# Altium PCB USB_pwrmtr_v2.PcbDoc (part 2 of 2)
Units mm, origin at the board's own origin, x right, y up, seen from the top; angles counter-clockwise.
Board outline 25 x 55.1 mm, 4 copper layers (Top Layer, Layer 1, Layer 2, Bottom Layer), stack 1.564 mm thick; 63 components, 50 nets, 344 pads, 256 vias.
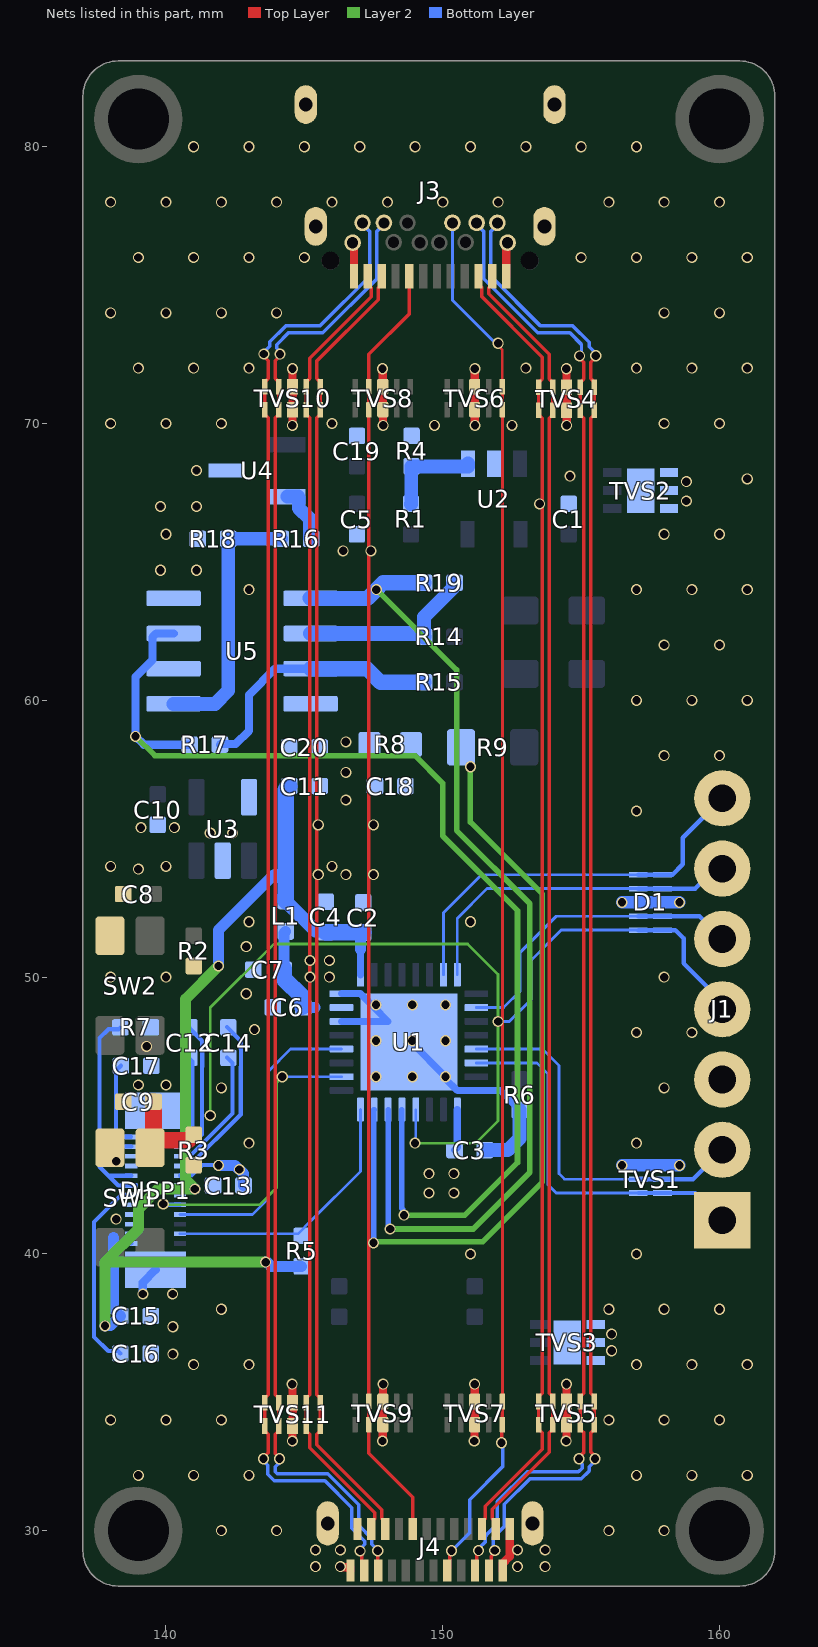
[diagram p4: the nets of this part, all layers, seen from the top]

## Via types
v1: diameter 0.4, hole 0.3, Top Layer to Bottom Layer, 112 vias
v2: diameter 0.4, hole 0.3, Layer 1 to Bottom Layer, tented both sides, 53 vias
v3: diameter 0.4, hole 0.3, Layer 2 to Bottom Layer, tented both sides, 41 vias
v4: diameter 0.4, hole 0.3, Top Layer to Bottom Layer, tented both sides, 34 vias
v5: diameter 0.4, hole 0.3, Top Layer to Layer 1, tented both sides, 14 vias
v6: diameter 0.4, hole 0.3, Top Layer to Layer 2, tented both sides, 2 vias

## Nets (pads, with @x,y where several pads share a name; then routed paths per layer and width w, separated by ;. In a path a pad name is that pad's centre, name@x,y a point inside that pad or via, vN(x,y) a via of type N, cw(c..) or ccw(c..) an arc to the next point about the centre after c; other vN are vias at no path point) (continued)
GND: C1.1 C2.1 C3.1 C4.1 C5.1 C6.1 C7.1 C8.1 C9.1 C10.1 C11.1 C13.1 C15.1 C16.1 C17.1 C18.2 C19.1 C20.1 D1.3_8 DISP1.5 DISP1.7 DISP1.10 DISP1.17 DISP1.19 DISP1.P1 DISP1.P2 J1.3 J3.A1 J3.A12 J3.B1 J3.B12 J3.S1 J3.S2 J3.S3 J3.S4 J4.A1 J4.A12 J4.B1 J4.B12 J4.S1 J4.S2 R4.2 R6.1 R7.2 R8.1 R18.1 SW1.2 SW2.2 TVS1.3 TVS1.4 TVS2.1 TVS2.2 TVS2.3 TVS2.7 TVS3.1 TVS3.2 TVS3.3 TVS3.7 TVS4.3 TVS4.8 TVS5.3 TVS5.8 TVS6.3 TVS6.8 TVS7.3 TVS7.8 TVS8.3 TVS8.8 TVS9.3 TVS9.8 TVS10.3 TVS10.8 TVS11.3 TVS11.8 U1.14 U1.16 U1.32 U1.33 U2.2 U3.2 U4.3 U5.8 | length 40.5
  Top Layer w0.3: v5@144.56,35.275 144.567,35.268 144.567,34.625 TVS11.8@144.575,34.617 TVS11.3@144.575,33.783 144.569,33.777 144.569,33.197 v5@144.563,33.191 ; v5(144.563,69.935) 144.569,69.94 144.569,70.494 TVS10.3@144.575,70.5 TVS10.8@144.575,71.335 144.572,71.338 144.572,71.969 v5@144.568,71.972 ; v1(146.3,28.7) 146.319,28.681 146.667,28.681 J4.B1@146.667,28.564 ; J3.B1@146.742,76.533 146.792,76.483 J3.A12@146.792,75.323 ; v5(147.824,71.981) 147.828,71.977 147.828,71.339 TVS8.8@147.832,71.335 TVS8.3@147.832,70.5 147.839,70.494 147.839,69.941 v4(147.845,69.935) ; v5(147.826,33.237) 147.829,33.241 147.829,33.829 TVS9.3@147.832,33.833 TVS9.8@147.832,34.667 147.84,34.675 147.84,35.285 v5(147.848,35.292) ; v5@151.138,33.241 151.146,33.249 151.146,33.824 TVS7.8@151.154,33.833 TVS7.3@151.154,34.667 TVS7.3@151.154,34.667 151.153,35.321 v5@151.152,35.322 ; v5@151.158,71.993 151.156,71.991 151.156,71.337 TVS6.3@151.154,71.335 TVS6.8@151.154,70.5 151.158,70.496 151.158,69.939 v4(151.162,69.935) ; J4.B12@152.167,28.564 152.167,28.814 152.417,29.064 J4.A1@152.417,30.064 ; J3.A1@152.292,75.323 152.292,76.483 J3.B12@152.342,76.533 ; v5@154.459,33.225 154.467,33.233 154.467,33.825 TVS5.3@154.475,33.833 TVS5.8@154.475,34.667 154.471,34.672 154.471,35.279 v5@154.467,35.283 ; v5@154.465,71.934 154.47,71.93 154.47,71.322 TVS4.8@154.475,71.317 TVS4.3@154.475,70.482 v4(154.475,69.935)
  Bottom Layer w0.15: DISP1.10@140.505,42.825 140.507,42.827 140.924,42.827 141.312,43.215 141.885,43.215 v2(141.9,43.2)
  Bottom Layer w0.254: U1.14@146.34,48.4 148.025,48.4 147.505,48.92 147.025,49.4 U1.16@146.34,49.4 ; v2(148.9,47.7) 148.9,47.6 v2(150.1,46.4) 150.1,46.325 150.525,45.9 U1.32@151.21,45.9 152.08,45.9 152.775,45.205 R6.1@152.775,45.2
  Bottom Layer w0.3: v2(139.165,38.551) 139.165,38.97 DISP1.P2@139.625,39.43
  Bottom Layer w0.4: v2(141.9,43.2) 142.5,43.2 142.8,42.9 C13.1@142.8,42.467
  Bottom Layer w0.45: v2(156.475,43.2) TVS1.3@157.112,43.2 v2(158.55,43.2) ; v2(156.475,52.7) D1.3_8@157.5,52.7 v2(158.55,52.7)
  Bottom Layer w0.5: C3.1@151.525,43.75 152.35,43.75 152.775,44.175 R6.1@152.775,45.2
  other v1: 145.4,28.7 152.7,28.7 153.7,28.7 145.4,29.3 146.3,29.3 152.7,29.3 153.7,29.3 142,30 144,30 156,30 158,30 139,32 141,32 143,32 157,32 159,32 161,32 138,34 140,34 142,34 156,34 158,34 160,34 141,36 143,36 157,36 159,36 161,36 142,38 156,38 158,38 160,38 151,40 157,40 143,44 157,44 142,46 158,46 157,48 159,48 138,50 140,50 158,50 143,52 151,52 138,54 140,54 146,54 157,56 158,58 160,58 157,60 159,60 161,60 158,62 160,62 143,64 157,64 159,64 161,64 140,66 158,66 160,66 161,68 138,70 140,70 142,70 146,70 158,70 160,70 139,72 141,72 143,72 153,72 157,72 159,72 161,72 138,74 140,74 142,74 144,74 158,74 160,74 139,76 141,76 143,76 145,76 155,76 157,76 159,76 161,76 138,78 140,78 142,78 144,78 146,78 148,78 150,78 152,78 156,78 158,78 160,78 141,80 143,80 145,80 147,80 149,80 151,80 153,80 155,80 157,80
  other v2: 140.248,36.379 156.1,36.5 156.1,37.1 140.248,37.369 140.24,38.551 138.2,41.254 142.65,43.05 138.2,43.35 140,46.1 147.585,46.4 148.9,46.4 139.3,47.5 147.585,47.7 150.1,47.7 143.2,48.1 147.585,49 148.9,49 150.1,49 142.9,49.4 142.9,51.1 145.5,53.7 146.5,53.7 147.5,53.7 141.6,55.2 142.4,55.2 139.1,55.4 140.3,55.4 145.5,55.5 147.5,55.5 146.5,56.4 146.5,57.4 146.5,58.5 139.8,64.7 141.1,64.7 146.4,65.4 147.4,65.4 139.8,67 141.1,67 153.5,67.1 158.8,67.2 158.8,67.9 154.6,68.1 141.1,68.3 149.7,69.935 152.5,69.935
  other v4: 139,46.1
  other v5: 144.563,33.237 151.138,33.237 154.459,33.237 144.56,35.292 151.152,35.292 154.467,35.292 139,53.9 144.568,71.981 151.158,71.981 154.465,71.981
NetC12_1: C12.1 DISP1.4 | length 4.8
  Bottom Layer w0.15: DISP1.4@140.68,43.875 140.857,43.875 141.3,44.318 141.3,46.749 141.31,46.759 141.31,47.41 141.3,47.42 141.3,47.702 140.857,48.145 C12.1@140.857,48.15
NetC12_2: C12.2 DISP1.2 | length 3.1
  Bottom Layer w0.15: DISP1.2@140.68,44.225 140.69,44.235 140.866,44.235 140.954,44.323 140.954,46.949 C12.2@140.857,47.045
NetC14_1: C14.1 DISP1.8 | length 6.2
  Bottom Layer w0.15: DISP1.8@140.68,43.175 140.836,43.175 142.7,45.039 142.7,46.749 142.71,46.759 142.71,47.41 142.7,47.42 142.7,47.695 C14.1@142.2,48.195
NetC14_2: C14.2 DISP1.6 | length 4.5
  Bottom Layer w0.15: DISP1.6@140.68,43.525 140.846,43.525 142.4,45.079 142.4,46.9 C14.2@142.2,47.1
NetC16_2: C16.2 DISP1.13 DISP1.15 | length 7.1
  Bottom Layer w0.15: C16.2@138.35,36.402 138.264,36.487 137.913,36.487 137.4,37 137.4,41.154 138.361,42.115 138.735,42.115 DISP1.13@138.745,42.125
NetC17_2: C17.2 DISP1.1 DISP1.3 | length 4.1
  Bottom Layer w0.15: C17.2@138.372,46.796 138.2,46.624 138.2,44.445 ; DISP1.1@138.734,44.235 138.41,44.235 138.2,44.445 ; DISP1.3@138.745,43.875 138.735,43.885 138.315,43.885 138.2,44 138.2,44.445
NetC18_1: C18.1 R8.2 R9.1 U1.7 | length 27.9
  Layer 2 w0.2: v3(147.5,40.4) 147.536,40.436 151.436,40.436 153.6,42.6 153.6,53 151,55.6 v3(151,57.6)
  Bottom Layer w0.2: v3(147.5,40.4) 147.513,40.413 147.513,45.203 U1.7@147.525,45.215
NetDISP1_9: DISP1.9 DISP1.11 R7.1 | length 8
  Bottom Layer w0.15: R7.1@138.354,48.184 138.286,48.117 137.917,48.117 137.6,47.8 137.6,43.15 137.925,42.825 ; DISP1.11@138.745,42.475 138.615,42.475 138.275,42.475 137.925,42.825 ; DISP1.11@138.745,42.485 138.91,42.485 DISP1.11@138.92,42.475 ; DISP1.9@138.745,42.825 137.925,42.825
NetR1_2: R1.2 R4.1 U2.1 | length 3.5
  Bottom Layer w0.5: R1.2@148.85,67.096 148.863,67.108 148.863,68.441 R4.1@148.875,68.453 150.906,68.453 150.91,68.457 U2.1@150.91,68.551
NetR14_2: R14.2 R19.2 U5.2 | length 6.6
  Bottom Layer w0.5: R14.2@149.325,62.3 149.325,63.005 150.375,64.055 150.375,64.205 150.42,64.25 R19.2@150.425,64.25
  Bottom Layer w0.55: U5.2@145.225,62.41 149.21,62.41 149.32,62.3 R14.2@149.325,62.3
NetR15_2: R15.2 R17.1 U5.3 | length 9.5
  Bottom Layer w0.3: R17.1@141.95,58.4 141.969,58.419 142.519,58.419 143,58.9 143,60.2 143.944,61.144 U5.3@145.225,61.144
  Bottom Layer w0.55: U5.3@145.225,61.14 147.26,61.14 147.75,60.65 R15.2@149.325,60.65
NetR16_1: R16.1 R18.2 U5.5 | length 9.6
  Bottom Layer w0.5: U5.5@140.275,59.87 141.77,59.87 142.25,60.35 R18.2@142.25,65.835 R16.1@144.15,65.835
NetR16_2: R16.2 U4.2 | length 2.1
  Bottom Layer w0.5: U4.2@144.384,67.36 144.765,67.36 144.795,67.331 144.795,66.95 145.2,66.545 145.2,65.88 145.245,65.835 R16.2@145.25,65.835
NetR17_2: R17.2 U1.5 U5.6 U5.7 | length 42.1
  Layer 2 w0.2: v3(138.9,58.7) 139.6,58 149,58 150,57 150,55.1 152.7,52.4 152.7,43.3 150.8,41.4 v3(148.6,41.4)
  Bottom Layer w0.2: U1.5@148.525,45.215 148.525,41.642 148.552,41.615 148.552,41.448 v3(148.6,41.4)
  Bottom Layer w0.3: U5.7@140.275,62.414 139.646,62.414 139.511,62.279 139.511,61.459 139.386,61.333 138.9,60.847 v3(138.9,58.7) 139.2,58.4 R17.2@140.85,58.4
NetR19_1: R19.1 U1.6 U5.1 | length 37.9
  Layer 2 w0.2: v3(147.6,64) 150.5,61.1 150.5,55.3 153.15,52.65 153.15,42.95 151.1,40.9 v3(148.1,40.9)
  Bottom Layer w0.2: U1.6@148.025,45.215 148.025,41.043 148.1,40.968 v3(148.1,40.9)
  Bottom Layer w0.55: U5.1@145.215,63.694 U5.1@145.225,63.684 ; U5.1@145.225,63.68 147.28,63.68 v3(147.6,64) 147.85,64.25 R19.1@149.325,64.25
NRST: C9.2 D1.1 D1.10 J1.4 R3.2 SW1.1 U1.4 | length 41.2
  Top Layer w0.6: SW1.1@139.425,43.837 139.55,43.962 C9.2@139.55,45.5 ; SW1.1@139.425,43.875 139.65,44.1 140.8,44.1 R3.2@141,44.3
  Layer 2 w0.1: v6(141.6,45) 141.6,48.9 143.9,51.2 150.9,51.2 152,50.1 v3(152,48.4) 152,44.8 151.2,44 v3(149,44)
  Bottom Layer w0.1: v3@149.019,44 149.025,44.006 U1.4@149.025,45.196 ; v3(152,48.4) 152.4,48.4 153.2,49.2 153.2,50.621 154.279,51.7 D1.1@157.062,51.7
  Bottom Layer w0.16: D1.1@157.062,51.7 D1.10@157.937,51.7 158.4,51.7 158.7,51.4 158.7,50.5 160.1,49.1 J1.4@160.1,48.84
RES#: DISP1.22 R5.2 U1.8 | length 9.7
  Bottom Layer w0.1: DISP1.22@140.505,40.725 144.77,40.725 145.245,41.2 145.25,41.2 147.025,42.975 U1.8@147.025,45.215
SBU1: J3.A8 J4.A8 TVS8.2 TVS8.9 TVS9.2 TVS9.9 | length 46.5
  Top Layer w0.125: J3.A8@148.792,75.323 148.792,73.956 147.332,72.497 TVS8.9@147.332,71.335 TVS8.2@147.332,70.5 TVS9.9@147.332,34.667 TVS9.2@147.332,33.833 147.332,32.799 148.917,31.215 J4.A8@148.917,30.064
SBU2: J3.B8 J4.B8 TVS6.1 TVS6.10 TVS7.1 TVS7.10 | length 50.4
  Top Layer w0.1: v4(152,72.9) 152,72.805 152.152,72.653 152.152,71.337 TVS6.1@152.154,71.335 TVS6.10@152.154,70.5 TVS7.1@152.154,34.667
  Top Layer w0.125: J4.B8@150.167,28.564 150.254,28.651 150.254,29.124 150.318,29.187 v4(150.318,29.275) ; v4(152.123,33.178) 152.138,33.193 152.138,33.817 TVS7.10@152.154,33.833 TVS7.1@152.154,34.667
  Bottom Layer w0.1: J3.B8@150.35,77.25 150.35,74.455 151.905,72.9 v4(152,72.9)
  Bottom Layer w0.125: v4(150.318,29.275) 150.325,29.275 150.975,29.925 150.975,31.125 152.175,32.325 152.175,33.126 v4(152.123,33.178)
SPI1_MOSI: DISP1.18 U1.12 | length 11
  Bottom Layer w0.1: DISP1.18@140.505,41.425 143.125,41.425 143.7,42 143.7,46.6 144.5,47.4 U1.12@146.34,47.4
SPI1_SCK: DISP1.16 U1.10 | length 11.2
  Layer 2 w0.1: v3(139.9,41.8) 139.926,41.774 143.374,41.774 144,42.4 144,46.2 v3(144.2,46.4)
  Bottom Layer w0.1: v3(144.2,46.4) U1.10@146.34,46.4
  Bottom Layer w0.15: v3(139.9,41.8) 139.925,41.775 DISP1.16@140.505,41.775
SSRX1_N: J3.B10 J4.B10 TVS4.4 TVS4.7 TVS5.4 TVS5.7 | length 54.1
  Top Layer w0.125: J4.B10@151.167,28.564 151.228,28.625 151.228,29.216 v4(151.289,29.277) ; v4(154.925,32.6) 154.925,32.659 155.102,32.836 155.102,33.537 155.026,33.613 155.012,33.613 154.975,33.65 TVS5.7@154.975,34.667 154.975,34.85 155.012,34.887 155.026,34.887 155.099,34.961 155.099,70.189 155.026,70.262 155.012,70.262 154.975,70.3 TVS4.4@154.975,70.482 154.975,71.5 155.012,71.537 155.022,71.537 155.095,71.611 155.095,72.217 154.946,72.366 v4(154.946,72.447)
  Bottom Layer w0.125: J3.B10@151.225,77.25 151.225,77.188 151.474,76.939 151.474,75.225 153.426,73.273 154.596,73.273 155.012,72.856 155.012,72.601 154.946,72.535 v4(154.946,72.447) ; v4(151.289,29.277) 151.289,29.344 151.542,29.598 151.542,29.794 151.579,29.831 151.579,29.86 151.973,30.254 151.973,31.054 153.046,32.127 154.902,32.127 155.036,32.261 155.036,32.401 154.925,32.512 v4(154.925,32.6)
SSRX1_P: J3.B11 J4.B11 TVS4.5 TVS4.6 TVS5.5 TVS5.6 | length 54.1
  Top Layer w0.125: J4.B11@151.667,28.564 151.754,28.651 151.754,29.076 151.877,29.199 v4(151.877,29.287) ; v4(155.502,32.6) 155.502,32.687 155.354,32.836 155.354,33.539 155.427,33.613 155.438,33.613 155.475,33.65 TVS5.6@155.475,34.667 155.475,34.85 155.438,34.887 155.424,34.887 155.351,34.961 155.351,70.189 155.424,70.262 155.438,70.262 155.475,70.3 TVS4.5@155.475,70.482 155.475,71.5 155.347,71.628 155.347,72.214 155.527,72.394 v4(155.527,72.45)
  Bottom Layer w0.125: v4(151.877,29.287) 151.831,29.333 151.831,29.756 152.225,30.15 152.225,30.95 153.15,31.875 155.007,31.875 155.288,32.156 155.288,32.314 155.502,32.527 v4(155.502,32.6) ; J3.B11@151.975,77.25 151.975,77.188 151.726,76.939 151.726,75.33 153.531,73.525 154.7,73.525 155.288,72.937 155.288,72.777 155.527,72.538 v4(155.527,72.45)
SSRX2_N: J3.A10 J4.A10 TVS10.5 TVS10.6 TVS11.5 TVS11.6 | length 47.5
  Top Layer w0.125: J3.A10@147.792,75.323 147.792,75.023 147.668,74.899 147.668,74.478 145.451,72.261 145.451,71.628 145.524,71.555 145.538,71.555 145.575,71.517 TVS10.6@145.575,71.335 145.575,70.317 145.538,70.28 145.524,70.28 145.451,70.207 145.451,34.911 145.524,34.837 145.538,34.837 145.575,34.8 TVS11.5@145.575,33.783 145.575,33.6 145.538,33.563 145.524,33.563 145.451,33.489 145.451,33.098 147.793,30.756 147.793,30.438 147.917,30.314 J4.A10@147.917,30.064
SSRX2_P: J3.A11 J4.A11 TVS10.4 TVS10.7 TVS11.4 TVS11.7 | length 47.5
  Top Layer w0.125: J3.A11@147.292,75.323 147.292,75.023 147.416,74.899 147.416,74.582 145.199,72.365 145.199,71.628 145.126,71.555 145.112,71.555 145.075,71.517 TVS10.7@145.075,71.335 145.075,70.317 145.112,70.28 145.126,70.28 145.199,70.207 145.199,34.911 145.126,34.837 145.112,34.837 145.075,34.8 TVS11.4@145.075,33.783 145.075,33.6 145.112,33.563 145.126,33.563 145.199,33.489 145.199,32.993 147.541,30.651 147.541,30.438 147.417,30.314 J4.A11@147.417,30.064
SSTX1_N: J3.A3 J4.A3 TVS4.1 TVS4.10 TVS5.1 TVS5.10 | length 47.4
  Top Layer w0.125: J3.A3@151.292,75.323 151.292,75.023 151.416,74.899 151.416,74.581 153.599,72.398 153.599,71.611 153.526,71.537 153.512,71.537 153.475,71.5 TVS4.1@153.475,70.482 153.475,70.3 153.512,70.262 153.526,70.262 153.599,70.189 153.599,34.961 153.526,34.887 153.512,34.887 153.475,34.85 TVS5.10@153.475,34.667 TVS5.1@153.475,33.833 153.475,33.65 153.512,33.613 153.526,33.613 153.599,33.539 153.599,32.937 151.541,30.879 151.541,30.438 151.417,30.314 J4.A3@151.417,30.064
SSTX1_P: J3.A2 J4.A2 TVS4.2 TVS4.9 TVS5.2 TVS5.9 | length 47.4
  Top Layer w0.125: J3.A2@151.792,75.323 151.792,75.023 151.668,74.899 151.668,74.685 153.851,72.502 153.851,71.611 153.924,71.537 153.938,71.537 153.975,71.5 TVS4.2@153.975,70.482 153.975,70.3 153.938,70.262 153.924,70.262 153.851,70.189 153.851,34.961 153.924,34.887 153.938,34.887 153.975,34.85 TVS5.9@153.975,34.667 TVS5.2@153.975,33.833 153.975,33.65 153.938,33.613 153.924,33.613 153.851,33.539 153.851,32.832 151.793,30.774 151.793,30.438 151.917,30.314 J4.A2@151.917,30.064
SSTX2_N: J3.B3 J4.B3 TVS10.2 TVS10.9 TVS11.2 TVS11.9 | length 54.1
  Top Layer w0.125: v4@144.1,32.55 144.1,32.637 143.951,32.786 143.951,33.489 144.024,33.563 144.038,33.563 144.075,33.6 TVS11.2@144.075,33.783 TVS11.9@144.075,34.617 144.075,34.8 144.038,34.837 144.024,34.837 143.951,34.911 143.951,70.207 144.024,70.28 144.038,70.28 144.075,70.317 TVS10.2@144.075,70.5 TVS10.9@144.075,71.335 144.075,71.517 144.038,71.555 144.024,71.555 143.951,71.628 143.951,71.925 143.951,72.275 144.118,72.442 v4(144.118,72.506) ; v4(147.65,29.275) 147.659,29.266 147.659,28.572 J4.B3@147.667,28.564
  Bottom Layer w0.125: v4@144.1,32.55 144.1,32.462 143.95,32.312 143.95,32.125 144.023,32.052 145.848,32.052 146.965,30.935 146.965,30.189 147.437,29.718 147.437,29.511 147.65,29.297 v4(147.65,29.275) ; v4(144.118,72.506) 144.118,72.594 143.997,72.714 143.997,72.845 144.425,73.273 145.666,73.273 147.613,75.221 147.613,76.939 147.875,77.201 J3.B3@147.875,77.25
  other v4: 144.1,32.6
SSTX2_P: J3.B2 J4.B2 TVS10.1 TVS10.10 TVS11.1 TVS11.10 | length 54.2
  Top Layer w0.125: v4@143.523,32.55 143.523,32.638 143.699,32.814 143.699,33.489 143.626,33.563 143.612,33.563 143.575,33.6 TVS11.10@143.575,34.617 143.575,34.8 143.612,34.837 143.626,34.837 143.699,34.911 143.699,70.207 143.626,70.28 143.612,70.28 143.575,70.317 TVS10.1@143.575,70.5 143.575,71.517 143.612,71.555 143.626,71.555 143.699,71.628 143.699,71.821 ; v4(143.536,72.511) 143.536,72.437 143.699,72.275 143.699,71.821 ; v4(147.017,29.268) 147.017,29.18 147.08,29.118 147.08,28.651 J4.B2@147.167,28.564
  Bottom Layer w0.125: v4@143.523,32.55 143.523,32.516 143.675,32.364 143.675,32.044 143.919,31.8 145.744,31.8 146.713,30.83 146.713,30.085 147.185,29.614 147.185,29.504 147.017,29.336 v4(147.017,29.268) ; v4(143.536,72.511) 143.536,72.578 143.745,72.787 143.745,72.95 144.321,73.525 145.561,73.525 147.361,75.325 147.361,76.939 147.1,77.201 J3.B2@147.1,77.25
  other v4: 143.523,32.6
SWCLK: D1.4 D1.7 J1.6 U1.24 | length 12.4
  Bottom Layer w0.1: U1.24@150.525,50.085 150.525,52.125 151.6,53.2 D1.4@157.062,53.2
  Bottom Layer w0.16: D1.4@157.062,53.2 D1.7@157.937,53.2 159.125,53.2 159.845,53.92 J1.6@160.1,53.92
SWDIO: D1.5 D1.6 J1.7 U1.23 | length 14.6
  Bottom Layer w0.1: U1.23@150.025,50.085 150.025,52.325 151.4,53.7 D1.5@157.062,53.7
  Bottom Layer w0.16: D1.5@157.062,53.7 D1.6@157.937,53.7 158.3,53.7 158.674,54.074 158.674,55.034 J1.7@160.1,56.46
SWO: D1.2 D1.9 J1.5 U1.26 | length 11.4
  Bottom Layer w0.1: U1.26@151.21,48.9 152.2,48.9 152.8,49.5 152.8,50.9 154.1,52.2 D1.2@157.062,52.2
  Bottom Layer w0.16: D1.2@157.062,52.2 D1.9@157.937,52.2 159.276,52.2 160.096,51.38 J1.5@160.1,51.38
USART1_RX: J1.1 TVS1.1 TVS1.6 U1.30 | length 13.6
  Bottom Layer w0.1: U1.30@151.21,46.9 153.4,46.9 153.8,46.5 153.8,42.5 154.1,42.2 TVS1.1@157.065,42.2
  Bottom Layer w0.16: TVS1.1@157.065,42.2 TVS1.6@157.935,42.2 159.12,42.2 J1.1@160.1,41.22
USART1_TX: J1.2 TVS1.2 TVS1.5 U1.29 | length 13.6
  Bottom Layer w0.1: U1.29@151.21,47.4 153.6,47.4 154.2,46.8 154.2,42.9 154.4,42.7 TVS1.2@157.065,42.7
  Bottom Layer w0.16: TVS1.2@157.065,42.7 TVS1.5@157.935,42.7 159.04,42.7 J1.2@160.1,43.76
VDD: C2.2 C3.2 C4.2 C11.2 C13.2 C15.2 C20.2 DISP1.12 DISP1.14 DISP1.21 DISP1.23 L1.1 R2.1 R3.1 R5.1 U1.1 U1.17 U3.5 U5.4 | length 43.2
  Layer 2 w0.4: v3(137.8,37.4) 137.8,39.7 ; v4(141.9,50.4) 140.7,49.2 140.7,42.687 v4(141.042,42.345) 139.717,42.345 139,41.628 139,40.9 137.8,39.7 ; v3(143.6,39.7) 137.8,39.7
  Bottom Layer w0.15: 138.1,40.6 138.325,40.375 DISP1.23@138.745,40.375
  Bottom Layer w0.254: U1.17@147.025,50.085 147.025,50.996 ; C3.2@150.425,43.75 150.523,43.848 150.523,45.213 U1.1@150.525,45.215
  Bottom Layer w0.4: v3(137.8,37.4) 137.81,37.41 138,37.41 138.254,37.664 138.259,37.664 C15.2@138.354,37.759 138.349,37.759 138.254,37.854 138.254,37.859 138.1,38.013 138.1,40.6 ; v4(141.9,50.4) 141.9,51.699 143.892,53.69 143.99,53.69 144,53.7 144.324,53.376 144.325,53.375 L1.1@144.325,52.75 ; v3(143.6,39.7) 143.654,39.7 143.804,39.55 R5.1@144.9,39.55 ; C4.2@145.768,51.529 C4.2@145.771,51.525 ; 147.025,50.996 147.026,50.997 147.026,51.266 147.03,51.269 147.03,51.505 C2.2@147.125,51.6
  Bottom Layer w0.5: L1.1@144.324,52.746 144.37,52.7 144.372,52.7 145.397,51.675 145.723,51.675 145.768,51.63 C4.2@145.768,51.625
  Bottom Layer w0.6: L1.1@144.324,52.751 144.324,53.376 144.324,56.774 C11.2@144.45,56.9 ; C4.2@145.768,51.625 147.125,51.625 C2.2@147.125,51.6
  other v3: 149.5,42.2 150.4,42.2 149.5,42.9 150.4,42.9 145.2,50 145.9,50 145.2,50.6 145.9,50.6
VDDA: C6.2 C7.2 L1.2 U1.15 | length 3.9
  Bottom Layer w0.4: C7.2@144.27,50.307 144.27,51.595 L1.2@144.325,51.65 ; C6.2@144.925,48.935 ccw(c145.01,49.02) C6.2@145.01,48.9 ; C6.2@144.96,48.9 C6.2@145.01,48.9 ; C6.2@145.01,48.9 145.389,48.9 C6.2@145.01,48.9
  Bottom Layer w0.6: C7.2@144.25,50.3 144.25,49.955 144.925,49.28 C6.2@144.925,48.935
pads on no net: J3. SW1.1' SW1.2' SW2.1' SW2.2' U1.2 U1.3 U1.13 U1.19 U1.20 U1.21 U1.22 U1.25 U1.27 U1.28 U2.3 U3.1 U3.3

## Polygon pours and split planes (outlines as drawn)
VDD on Bottom Layer "VDD_L04_P082" (solid, pour order 82): 150.138,44.044 ccw(c149.505,44.676) 150.4,44.676 150.4,44.8 150.65,44.8 150.65,44.231 ccw(c150.914,44.231) 150.727,44.044 150.814,43.957 ccw(c150.814,43.52) 150.504,43.829 150.425,43.75
VDD on Bottom Layer "VDD_L04_P039" (solid, pour order 39): 150.9,43.871 150.727,44.044 150.138,44.044 149.9,43.806 149.9,43.293 149.755,43.148 149.327,43.148 149.2,43.021 149.2,42 149.3,41.9 150.572,41.9 150.9,42.228
NetC16_2 on Bottom Layer "NETC16_2_L04_P062" (solid, pour order 62): 138.967,42.206 138.006,42.206 137.921,42.121 137.921,41.779 138.008,41.692 138.963,41.692
CABLE_VCC_USB_C on Bottom Layer "CABLE_VCC_USB_C_L04_P075" (solid, pour order 75): 155.4,68.413 155.4,69.154 155.408,69.145 156.8,69.145 156.8,68.7 156.5,68.4
CABLE_VCC_USB_C on Bottom Layer "CABLE_VCC_USB_C_L04_P074" (solid, pour order 74): 155.4,68.707 155.4,69.6 155.7,69.9 156.6,69.9 156.8,69.7 156.8,68.691
4V on Bottom Layer "4V_L04_P011" (solid, pour order 11): 143.1,69.543 143.1,69 143.8,68.3 145.2,68.3 146.2,67.3 146.2,66.9 146.5,66.6 147.3,66.6 148.5,65.4 151.1,65.4 151.3,65.6 151.3,66.4 151.2,66.5 148.6,66.5 147.7,67.4 147.7,68.8 147.5,69 145.9,69 145.357,69.543
GND on Bottom Layer "GND_L04_P072" (solid, pour order 72): 144.2,49.1 143.5,49.8 143.5,51.1 143.2,51.4 142.6,51.4 142.3,51.1 142.3,49 142.5,48.8 142.8,48.8 142.9,48.7 142.9,48 143.1,47.8 144,47.8 144.2,48
DUT_VCC_USB_C on Bottom Layer "DUT_VCC_USB_C_L04_P004" (solid, pour order 4): 146.1,35.8 145.872,36.028 145.872,36.472 146.2,36.8 151.7,36.8 152.1,37.2 152.1,39.9 152.4,40.2 153.4,40.2 153.8,39.8 153.8,36 153.6,35.8
GND on Bottom Layer "GND_L04_P070" (solid, pour order 70): 138.953,55.047 141.353,55.047 141.7,54.7 141.7,53.6 141.8,53.5 142.3,53.5 142.4,53.6 142.4,54.7 142.8,55.1 142.8,55.4 142.582,55.618 140.682,55.618 140.4,55.9 138.9,55.9 138.8,55.8 138.8,55.2
GND on Bottom Layer "GND_L04_P064" (solid, pour order 64): 138.53,40.091 138.525,38.766 138.805,38.5 139.1,38.205 139.1,36.1 139.2,36 140.3,36 140.5,36.2 140.5,38.541 140.724,38.766 140.093,39.4 139.2,39.4
GND on Bottom Layer "GND_L04_P063" (solid, pour order 63): 138.963,41.508 138.034,41.508 137.925,41.399 137.925,41.099 138.028,40.995 138.961,40.995
VDD on Bottom Layer "VDD_L04_P061" (solid, pour order 61): 138.965,40.806 138.006,40.806 137.913,40.713 137.913,40.387 138.01,40.29 138.965,40.29
DUT_VCC_USB_C on Bottom Layer "DUT_VCC_USB_C_L04_P060" (solid, pour order 60): 156.1,55.7 156.5,56.1 156.5,61.4 156,61.9 155.2,61.1 155.2,59.3
DUT_VCC_USB_C on Bottom Layer "DUT_VCC_USB_C_L04_P017" (solid, pour order 17): 151.9,58.3 151.9,57.1 153.7,55.3 155.7,55.3 156.1,55.7 156.1,60.3 153.9,60.3
DUT_VCC_USB_C on Bottom Layer "DUT_VCC_USB_C_L04_P018" (solid, pour order 18): 152.25,40.05 153,40.8 155.8,40.8 156.1,40.5 156.1,38.9 155.2,38 153.2,38 153.2,39.1
GND on Bottom Layer "GND_L04_P053" (solid, pour order 53): 138.5,44.5 138.5,46 138.9,46.4 138.9,48.3 139.1,48.5 139.8,48.5 140,48.3 140,46.5 140.725,45.835
VDD on Bottom Layer "VDD_L04_P052" (solid, pour order 52): 140.3,42.6 141,42.6 141.165,42.765 141.935,42.765 142,42.7 142,42.218 141.821,42.039 140.284,42.039 140.284,42.584
GND on Bottom Layer "GND_L04_P051" (solid, pour order 51): 138.966,43.608 138.028,43.608 137.919,43.5 137.919,43.2 138.029,43.089 138.965,43.089
GND on Bottom Layer "GND_L04_P037" (solid, pour order 37): 156.65,68.385 158.815,68.385 159.1,68.1 159.1,67 158.875,66.775 156.65,66.775
GND on Bottom Layer "GND_L04_P044" (solid, pour order 44): 154,37.6 156.2,37.6 156.4,37.4 156.4,36.2 156.2,36 154,36
NetR1_2 on Bottom Layer "NETR1_2_L04_P043" (solid, pour order 43): 150.8,66.7 151.196,66.7 151.3,66.804 151.3,67.2 151.2,67.1 150.85,67.1
NetR1_2 on Bottom Layer "NETR1_2_L04_P042" (solid, pour order 42): 151.3,67 151,66.7 150.8,66.7 151.3,67.2
NetR1_2 on Bottom Layer "NETR1_2_L04_P041" (solid, pour order 41): 151.164,69.027 151.3,68.891 151.3,67 151.164,66.864
NetR1_2 on Bottom Layer "NETR1_2_L04_P040" (solid, pour order 40): 151.164,69.027 151.164,67.064 150.8,66.7 148.7,66.7 147.9,67.5 147.9,68.8 148.1,69
VDD on Bottom Layer "VDD_L04_P027" (solid, pour order 27): 144.418,52.298 144.9,51.816 144.9,49.985 145.185,49.7 145.929,49.7 146.2,49.971 146.2,51.8 145.4,51.8 144.9,52.3 144.35,52.3
VDD on Bottom Layer "VDD_L04_P019" (solid, pour order 19): 144.3,60.4 143.7,59.8 143.7,57.7 143.3,57.3 142.8,57.3 142.6,57.1 142.6,55.9 142.8,55.7 144.5,55.7 144.9,56.1 144.9,58.7 145.4,59.2 146.3,59.2 146.5,59.4 146.5,60.1 146.2,60.4
GND on Bottom Layer "GND_L04_P036" (solid, pour order 36): 147.2,66.4 147.7,65.9 147.7,65.3 147.5,65.1 146.3,65.1 146.1,65.3 146.1,65.9 146.6,66.4
CABLE_VCC_USB_C on Bottom Layer "CABLE_VCC_USB_C_L04_P007" (solid, pour order 7): 151.5,62.8 151.9,62.4 156.1,62.4 156.5,62.8 156.5,68.4 156.4,68.5 155.487,68.5 155.4,68.413 155.4,66.7 155.2,66.5 151.6,66.5 151.5,66.4
GND on Bottom Layer "GND_L04_P035" (solid, pour order 35): 155,66.7 155.2,66.9 155.2,69.7 154.4,70.5 146.7,70.5 146.3,70.1 146.3,69.5 146.557,69.243 151.5,69.243 151.5,66.8 151.6,66.7
GND on Bottom Layer "GND_L04_P033" (solid, pour order 33): 141.4,63 141.6,63.2 141.6,67.1 141.8,67.3 142.9,67.3 143.1,67.5 143.1,68.5 142.9,68.7 140.5,68.7 139.2,67.4 139.2,63.2 139.4,63
NetR17_2 on Bottom Layer "NETR17_2_L04_P029" (solid, pour order 29): 140.9,62.7 139.35,62.7 139.2,62.55 139.2,61.219 138.84,60.859 140.909,60.859 141.25,61.2 141.25,62.475
VDD on Bottom Layer "VDD_L04_P026" (solid, pour order 26): 144.9,56.1 144.9,52.5 144.7,52.3 144,52.3 143.8,52.5 143.8,55.5 143.5,55.8 143.8,56.1
GND on Bottom Layer "GND_L04_P025" (solid, pour order 25): 145.1,52.7 145.6,52.2 147.4,52.2 148,52.8 148,58.6 147.6,59 145.5,59 145.1,58.6
VDD on Bottom Layer "VDD_L04_P021" (solid, pour order 21): 147.152,50.483 147.152,50.78 cw(c147.33,50.776) 147.167,50.848 cw(c147.309,50.787) 147.182,50.874 cw(c147.319,50.786) 147.202,50.9 146.84,50.919 cw(c146.678,50.81) 146.858,50.885 cw(c146.681,50.738) 146.885,50.845 cw(c146.681,50.769) 146.899,50.761 146.899,50.48
VDDA on Bottom Layer "VDDA_L04_P020" (solid, pour order 20): 145.389,49.15 ccw(c145.686,49.447) 145.686,49.027 146.159,49.027 146.159,48.773 145.685,48.773 ccw(c145.685,48.353) 145.388,48.65
DUT_VCC_USB_C on Bottom Layer "DUT_VCC_USB_C_L04_P009" (solid, pour order 9): 151.7,61.9 151.1,61.3 150.2,61.3 149.9,61 149.9,60.2 150.2,59.9 151,59.9 151.9,59 151.9,57.6 152.2,57.3 153.7,57.3 154,57.6 154,59.1 154.8,59.9 156.1,59.9 156.1,61.8 156,61.9
NetC18_1 on Bottom Layer "NETC18_1_L04_P010" (solid, pour order 10): 148.2,58.9 148.7,59.4 151.1,59.4 151.6,58.9 151.6,57.604 151.296,57.3 149.5,57.3 149.3,57.1 149.3,56.4 149.1,56.2 148.4,56.2 148.2,56.4
CABLE_VCC_USB_C on Bottom Layer "CABLE_VCC_USB_C_L04_P008" (solid, pour order 8): 151.5,64 151.5,63.6 151,63.1 150.2,63.1 149.9,62.8 149.9,61.9 150.3,61.5 151,61.5 151.6,62.1 156.1,62.1 156.5,62.5 156.5,64
GND on Layer 2 "GND_L03_P080" (solid, remove dead copper, pour order 80): 137.4,30 ccw(c139,30) 139,28.4 160,28.4 ccw(c160,30) 161.6,30 161.6,81 ccw(c160,81) 160,82.6 139,82.6 ccw(c139,81) 137.4,81 137.4,29.9
CABLE_VCC_USB_C on Layer 2 "CABLE_VCC_USB_C_L03_P076" (solid, pour order 76): 156.5,68.4 156.8,68.7 156.8,69.7 156.45,70.05 155.9,69.5 155.8,69.5
CABLE_VCC_USB_C on Layer 2 "CABLE_VCC_USB_C_L03_P073" (solid, pour order 73): 156.5,68.4 156.5,73.6 155.3,74.8 151.5,74.8 151.2,75.1 151.2,76.7 151,76.9 150.6,76.9 150.4,76.7 150.4,75.1 150.1,74.8 149,74.8 148.6,75.2 148.6,76.7 148.4,76.9 148,76.9 147.8,76.7 147.8,75.1 148.8,74.1 155.1,74.1 155.9,73.3 155.9,70.1 155.4,69.6 155.4,68.4 155.6,68.2 156.3,68.2
VDD on Layer 2 "VDD_L03_P031" (solid, pour order 31): 144.9,50.7 145.1,50.9 146,50.9 146.2,50.7 146.2,43.9 146.95,43.15 149.775,43.15 149.775,41.9 146.35,41.9 144.9,43.35
DUT_VCC_USB_C on Layer 2 "DUT_VCC_USB_C_L03_P016" (solid, pour order 16): 153,58.4 152.6,58 152.6,56.4 154,55 154,41 154,41.8 153.2,41 152.4,40.2 152.4,38.6 153,38 155,38 155,58.4
DUT_VCC_USB_C on Layer 2 "DUT_VCC_USB_C_L03_P059" (solid, pour order 59): 155.2,38 156.1,38.9 156.1,57.9 155.6,58.4 154.25,58.4 154.25,38.45 154.7,38
VDD on Layer 2 "VDD_L03_P038" (solid, pour order 38): 149.143,43.15 150.55,43.15 150.7,43 150.7,42.025 150.575,41.9 149.637,41.9
GND on Top Layer "GND_L01_P078" (solid, pour order 78): 152.2,30 152.417,29.783 152.417,29.064 152.167,28.814 152.167,28.167 153.767,28.167 154.1,28.5 154.1,30.8 153.5,31.4 152.8,31.4 152.2,30.8
GND on Top Layer "GND_L01_P077" (solid, pour order 77): 147.064,29.964 146.687,29.587 146.687,29.013 146.8,28.9 146.8,28.3 146.667,28.167 145.333,28.167 145,28.5 145,30.9 145.5,31.4 146.4,31.4 147.064,30.736
VDD on Top Layer "VDD_L01_P069" (solid, pour order 69): 140.6,51 140.4,50.8 140.4,50 140.6,49.8 141.9,49.8 142.2,50.1 142.2,50.7 141.9,51
BUTTON0 on Top Layer "BUTTON0_L01_P068" (solid, pour order 68): 139.1,50.5 138.8,50.8 138.8,52.2 139.1,52.5 139.9,51.7 139.9,51.4
GND on Top Layer "GND_L01_P067" (solid, pour order 67): 138.5,50.7 138.6,50.8 138.6,52.5 138.8,52.7 138.8,53.5 137.8,52.5
BUTTON0 on Top Layer "BUTTON0_L01_P065" (solid, pour order 65): 139,53.2 139.4,53.6 141.6,53.6 142.2,53 142.2,51.6 141.8,51.2 140.4,51.2 140.2,51 140.2,50.7 140,50.5 139.1,50.5 139,50.6
GND on Top Layer "GND_L01_P066" (solid, pour order 66): 138.5,50.7 138.5,53 139.3,53.8 139.3,54 139.1,54.2 138.6,54.2 137.4,53 137.4,50.9 137.6,50.7
NRST on Top Layer "NRST_L01_P057" (solid, pour order 57): 138.9,43.1 138.8,43.2 138.8,44.9 139.1,45.2 139.1,45.62 139.58,46.1 141.3,46.1 141.9,45.5 141.9,44.4 141.3,43.8 140.3,43.8 140.1,43.6 140.1,43.3 139.9,43.1
GND on Top Layer "GND_L01_P056" (solid, pour order 56): 138.9,45.3 138.9,45.6 139.3,46 139.3,46.2 139.1,46.4 138.6,46.4 137.75,45.55
GND on Top Layer "GND_L01_P055" (solid, pour order 55): 138.5,43.1 138.6,43.2 138.6,45 138.9,45.3 138.9,45.8 138.8,45.9 138.1,45.9 137.4,45.2 137.4,43.2 137.5,43.1
VDD on Top Layer "VDD_L01_P054" (solid, pour order 54): 140.742,43.506 141.342,43.506 141.442,43.406 141.442,42.106 141.342,42.006 140.742,42.006 140.642,42.106 140.642,43.406
GND on Layer 1 "GND_L02_P024" (solid, pour order 24): 137.4,30 ccw(c139,30) 139,28.4 160,28.4 ccw(c160,30) 161.6,30 161.6,81 ccw(c160,81) 160,82.6 139,82.6 ccw(c139,81) 137.4,81 137.4,29.9

## Silkscreen, mask and mechanical layers (free items; w line width, h text height)
Top Overlay:
  region: 1657 vertices and 0 holes, not listed, extent 139.359,60.461 143.344,63.445
  text "USB_pwrmtr_v1" at 138.121,68.729 h1 r270
Mechanical 1:
  lines w0.254: 137,29.27 ccw(c138.27,29.27) 138.27,28 160.73,28 ccw(c160.73,29.27) 162,29.27 162,81.83 ccw(c160.73,81.83) 160.73,83.1 155.5,83.1 139,83.1 138.27,83.1 ccw(c138.27,81.83) 137,81.83 137,29.27

## Text inside footprints (layer, text, board x,y; h text height)
J3: Mechanical 13 "PCB Edge" at 144.042,82.823 h0.81 r180